# EAGLE board TeslaBMS (EAGLE 7.4.0)
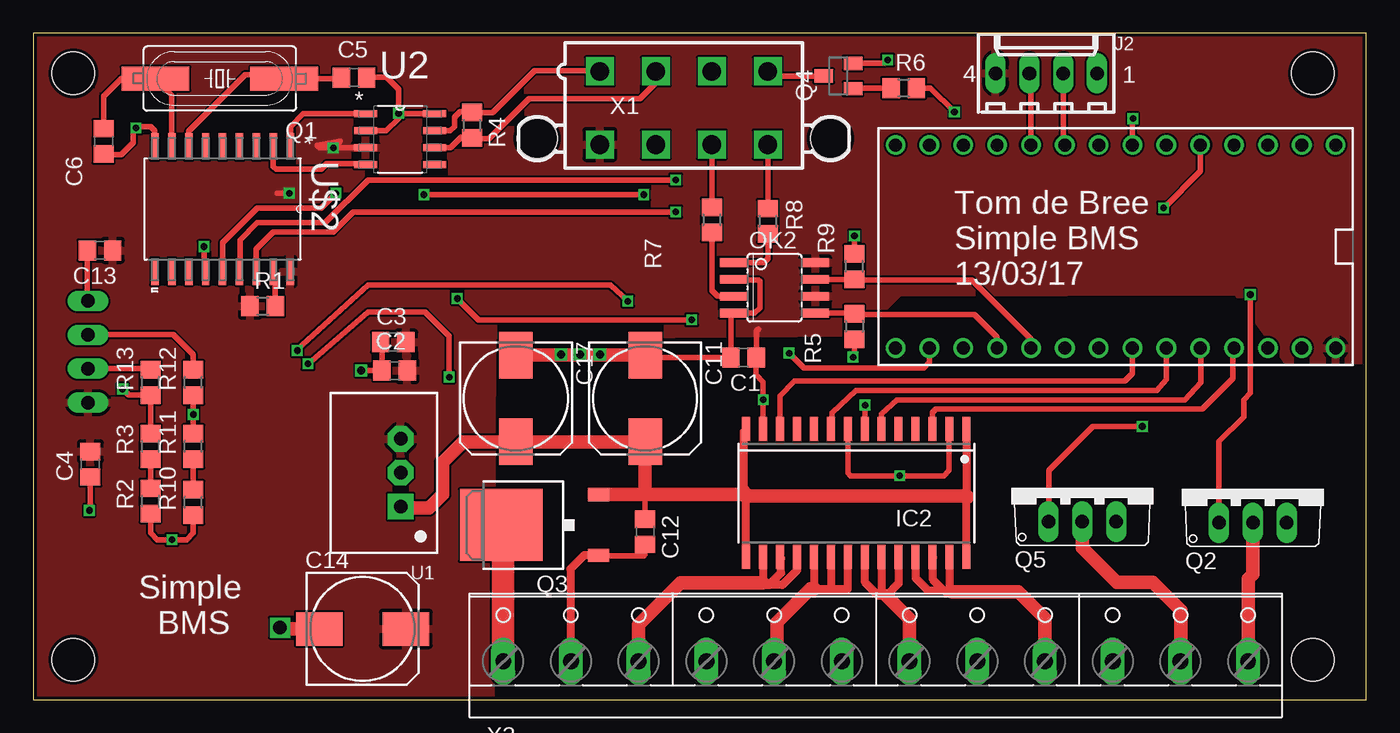
[diagram p0: board, top side]
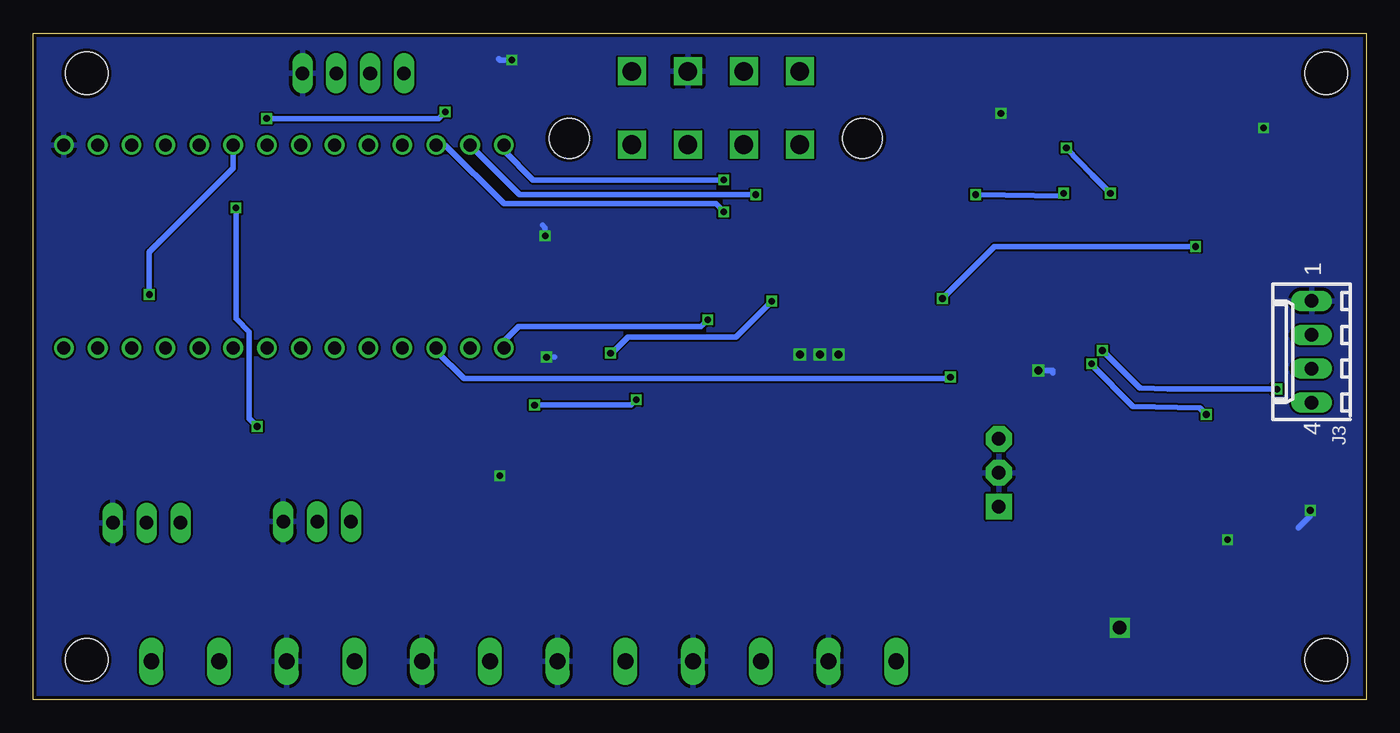
[diagram p1: board, bottom side, seen from below]

Size 100 x 50 mm. Coordinates in mm from the lower left corner, seen from the top.
Outline: 0,0 100,0 100,50 0,50 0,0
Copper layers (1*16): Top 0.035mm / dielectric 1.5mm / Bottom 0.035mm
Design rules "SeeedStudio_2layer_DRU_no_angle_20140221": minimum track width 6mil, minimum drill 12mil, track to track 6mil, track to pad 6mil, pad to pad 6mil, via to via 6mil, smd to smd 0mil, copper to edge 10mil, drill to drill 10mil, minimum pad ring 10mil, minimum via ring 6mil, stop-mask expansion 2mil, vias tented up to drill 100mil, thermal gap 10mil
Holes 3.2 mm at 96,3 96,47 3,47 3,3

## Footprints (pad centres in the part's own frame; a part is rotated, then mirrored left to right if it is on the bottom)
C0805 = smd 1.3 x 1.5: 1 -0.95,0; 2 0.95,0
153CLV-0810 = smd 3.5 x 2.5: + 3.25,0; - -3.25,0
PG-DSO-28 = smd 0.6 x 1.8: 1 -8.255,-4.8; 2 -6.985,-4.8; 3 -5.715,-4.8; 4 -4.445,-4.8; 5 -3.175,-4.8; 6 -1.905,-4.8; 7 -0.635,-4.8; 8 0.635,-4.8; 9 1.905,-4.8; 10 3.175,-4.8; 11 4.445,-4.8; 12 5.715,-4.8; 13 6.985,-4.8; 14 8.255,-4.8; 15 8.255,4.8; 16 6.985,4.8; 17 5.715,4.8; 18 4.445,4.8; 19 3.175,4.8; 20 1.905,4.8; 21 0.635,4.8; 22 -0.635,4.8; 23 -1.905,4.8; 24 -3.175,4.8; 25 -4.445,4.8; 26 -5.715,4.8; 27 -6.985,4.8; 28 -8.255,4.8
6410-04 = drill 1.016 long: 1 3.81,0; 2 1.27,0; 3 -1.27,0; 4 -3.81,0
SOIC08 = smd 0.66 x 2.032: 1 -1.905,-3.073; 2 -0.635,-3.073; 3 0.635,-3.073; 4 1.905,-3.073; 5 1.905,3.073; 6 0.635,3.073; 7 -0.635,3.073; 8 -1.905,3.073
SM49 = smd 5.08 x 1.778: 1 -4.826,0; 2 4.826,0
TO220V = drill 1.016 long: 1 -2.54,-2.54; 2 0,-2.54; 3 2.54,-2.54
TO252 = smd 1 x 1.6: 1 -2.28,-4.8; 2 2.28,-4.8 | smd 5.4 x 6.2: 3 0,2.5
SOT23 = smd 1 x 1.4: 1 -0.95,-1.1; 2 0.95,-1.1; 3 0,1.1
R0805 = smd 1.3 x 1.5: 1 -0.95,0; 2 0.95,0
R-78XX = drill 1.016 pad 1.93 square: 1 -2.54,0 | drill 1.016 pad 1.93 octagon: 2 0,0; 3 2.54,0
SOIC127P600X175-8N = smd 1.702 x 0.533: 1 -2.591,1.905; 2 -2.591,0.635; 3 -2.591,-0.635; 4 -2.591,-1.905; 5 2.591,-1.905; 6 2.591,-0.635; 7 2.591,0.635; 8 2.591,1.905
SOIC127P1034X264-18N = smd 1.981 x 0.559: 1 -4.699,5.08; 2 -4.699,3.81; 3 -4.699,2.54; 4 -4.699,1.27; 5 -4.699,0; 6 -4.699,-1.27; 7 -4.699,-2.54; 8 -4.699,-3.81; 9 -4.699,-5.08; 10 4.699,-5.08; 11 4.699,-3.81; 12 4.699,-2.54; 13 4.699,-1.27; 14 4.699,0; 15 4.699,1.27; 16 4.699,2.54; 17 4.699,3.81; 18 4.699,5.08
TEENSY3-DIL = drill 0.965: 0 -7.62,13.97; 1 -7.62,11.43; 2 -7.62,8.89; 3 -7.62,6.35; 3.3V 7.62,11.43; 4 -7.62,3.81; 5 -7.62,1.27; 6 -7.62,-1.27; 7 -7.62,-3.81; 8 -7.62,-6.35; 9 -7.62,-8.89; 10 -7.62,-11.43; 11 -7.62,-13.97; 12 -7.62,-16.51; 13 7.62,-16.51; 14/A0 7.62,-13.97; 15/A1 7.62,-11.43; 16/A2 7.62,-8.89; 17/A3 7.62,-6.35; 18/A4 7.62,-3.81; 19/A5 7.62,-1.27; 20/A6 7.62,1.27; 21/A7 7.62,3.81; 22/A8 7.62,6.35; 23/A9 7.62,8.89; AGND 7.62,13.97; GND -7.62,16.51; VIN 7.62,16.51
5566-8 = drill 1.4 square: 1 6.3,-2.75; 2 2.1,-2.75; 3 -2.1,-2.75; 4 -6.3,-2.75; 5 6.3,2.75; 6 2.1,2.75; 7 -2.1,2.75; 8 -6.3,2.75 | hole 3: 11,2.29; -11,2.29
W237-12P = drill 1.194 long: 1 -27.94,-0.635; 2 -22.86,-0.635; 3 -17.78,-0.635; 4 -12.7,-0.635; 5 -7.62,-0.635; 6 -2.54,-0.635; 7 2.54,-0.635; 8 7.62,-0.635; 9 12.7,-0.635; 10 17.78,-0.635; 11 22.86,-0.635; 12 27.94,-0.635

## Placement (x,y rotation side)
C1  100nf  [C0805]  53.29,25.67 180 top
C2  100nf  [C0805]  27.11,24.68 180 top
C3  100nF  [C0805]  27.01,26.83 0 top
C4  100nF  [C0805]  4.27,17.66 90 top
C5  15pF  [C0805]  24.06,46.68 180 top
C6  15pF  [C0805]  5.28,41.89 90 top
C11  100uf  [153CLV-0810]  45.9,22.6 270 top
C12  100nf  [C0805]  45.9,12.6 270 top
C13  100nf  [C0805]  5,33.7 180 top
C14  100uf  [153CLV-0810]  24.7,5.3 0 top
C17  100uf  [153CLV-0810]  36.2,22.6 270 top
IC2  BTS5440G  [PG-DSO-28]  61.74,15.5 180 top
J2  22-27-2041-04  [6410-04]  76,47 0 top
J3  22-27-2041-04  [6410-04]  4.1,26.1 90 bottom
OK2  ACPL-227  [SOIC08]  55.6,30.9 270 top
Q1  16Mhz  [SM49]  13.99,46.6 180 top
Q2  [TO220V]  91.5,15.8 0 top
Q3  FDD4141TO252  [TO252]  37.6,13.1 90 top
Q4  [SOT23]  60.4,46.8 90 top
Q5  [TO220V]  78.7,15.9 0 top
R1  10K  [R0805]  17.21,29.52 0 top
R2  10K  [R0805]  8.8,14.9 90 top
R3  10K  [R0805]  8.8,19 90 top
R4  120  [R0805]  32.9,43.1 270 top
R5  10K  [R0805]  61.6,28 270 top
R6  1K  [R0805]  65.3,45.9 0 top
R7  4.7K  [R0805]  50.9,36 270 top
R8  4.7K  [R0805]  55.1,35.9 270 top
R9  10K  [R0805]  61.6,32.5 90 top
R10  10K  [R0805]  12,14.8 90 top
R11  10K  [R0805]  12,19 90 top
R12  10K  [R0805]  12,23.8 90 top
R13  10K  [R0805]  8.8,23.8 90 top
U1  R-78XX  [R-78XX]  27.56,17.02 90 top
U2  PCA82C250T/N4,112  [SOIC127P600X175-8N]  27.52,42.05 0 top
U$2  MCP2510-I/SO  [SOIC127P1034X264-18N]  14.2,36.81 270 top
U$4  TEENSY_3.1_DIL  [TEENSY3-DIL]  81.2,34 270 top
X1  5566-8  [5566-8]  48.8,44.4 180 top
X3  [W237-12P]  63.2,3.5 0 top

## Library data of the parts
C1-C6 C11-C14 C17 R1-R13 = resistor
IC2 = Custom-TDB; OC_FARNELL: unknown; OC_NEWARK: unknown
J2 J3 X1 = con-molex; OC_FARNELL: unknown; OC_NEWARK: unknown
OK2 = optocoupler; MF: VISHAY/TELEFUNKEN; MPN: ILD205T; OC_FARNELL: 1469512; OC_NEWARK: 20H8678
Q1 = crystal; OC_FARNELL: unknown; OC_NEWARK: unknown
Q2 Q5 = adafruit
Q3 = transistor-fet
Q4 = semicon-smd-ipc
U1 = dc-dc-converter
U2 = NXP_By_element14_Batch_1; MPN: PCA82C250T/N4,112; OC_FARNELL: 1085275; OC_NEWARK: 99R2922; PACKAGE: SOIC-8; SUPPLIER: NXP Semiconductor
U$2 = Microchip_By_element14_Batch_1; MPN: MCP2510-I/SO; OC_FARNELL: 9758542; OC_NEWARK: 61K2944; PACKAGE: SOIC-18; SUPPLIER: Microchip
U$4 = Teensy_3_and_LC_Series_Boards_v1.1
X3 = con-wago-508; OC_FARNELL: unknown; OC_NEWARK: unknown

## Nets
+12V: Q3.3 X3.1
AGND: U$4.AGND
CANH1: R4.1 U2.7 X1.1
CANH2: J3.3 R13.2
CANL1: R4.2 U2.6 X1.2
CANL2: J3.2 R12.2
CUR1: R3.2 R13.1 U$4.14/A0
CUR2: R11.2 R12.1 U$4.15/A1
FUELGAUGE: R6.2 U$4.5
FUELOUT: Q4.3 X1.4
GND: C1.2 C2.2 C3.1 C4.1 C5.1 C6.1 C11.- C12.2 C13.2 C14.- C17.- IC2.2 IC2.8 J2.1 J3.1 OK2.2 OK2.4 Q2.3 Q3.1 Q4.2 Q5.3 R2.1 R5.2 R9.2 R10.1 U1.2 U2.2 U2.8 U$2.9 U$4.GND X1.3 X3.2 X3.4 X3.6 X3.8 X3.10
I1: OK2.5 R5.1 U$4.16/A2
I2: OK2.7 R9.1 U$4.17/A3
INPUT1: R7.1 X1.7
INPUT2: R8.1 X1.8
MISO: U$2.15 U$4.12
MOSI: U$2.14 U$4.11
N$1: U2.4 U$2.2
N$2: U2.1 U$2.1
N$3: R1.2 U$2.17
N$4: R2.2 R3.1
N$5: R10.2 R11.1
N$8: C6.2 Q1.2 U$2.8
N$14: Q4.1 R6.1
N$16: OK2.3 R7.2
N$17: OK2.1 R8.2
N$18: IC2.22 IC2.23 IC2.24 X3.7
N$19: IC2.19 IC2.20 IC2.21 X3.5
N$20: IC2.16 IC2.17 IC2.18 X3.3
N$26: IC2.25 IC2.26 IC2.27 X3.9
OSCCAN1: C5.2 Q1.1 U$2.7
OUT1: IC2.3 U$4.23/A9
OUT2: IC2.6 U$4.22/A8
OUT3: IC2.9 U$4.21/A7
OUT4: IC2.12 U$4.20/A6
OUT5: Q5.1 U$4.3
OUT5L: Q5.2 X3.11
OUT6: Q2.1 U$4.4
OUT6L: Q2.2 X3.12
RXBMS: J2.2 U$4.7
SCK: U$2.13 U$4.13
SSCAN1: U$2.16 U$4.10
SSCAN2: U$4.9
TXBMS: J2.3 U$4.8
V+: C11.+ C12.1 C17.+ IC2.1 IC2.14 IC2.15 IC2.28 Q3.2 U1.1
VCC: C1.1 C2.1 C3.2 C4.2 C13.1 C14.+ IC2.7 IC2.13 J2.4 J3.4 OK2.6 OK2.8 R1.1 U1.3 U2.3 U$2.18 U$4.VIN X1.5
VREF: U$4.3.3V

## Tracks (layer width: path | path; a pad name or v marks a point on that pad's centre or on a via)
+12V
  Top 1.676: X3.1 35.26,12.94 Q3.3
CANH1
  Top 0.406: U2.7 31.29,42.69 31.6,43 31.6,43.7 32,44.1 32.85,44.1 R4.1 34.45,44.05 37.6,47.2 42.45,47.2 X1.1
CANH2
  Top 0.406: J3.3 8.72,24.83 R13.2
CANL1
  Top 0.406: X1.2 46.7,46.3 45.5,45.1 37.2,45.1 34.2,42.1 33.5,42.1 | 33.5,42.1 32.95,42.1 R4.2 | U2.6 31.32,41.41 32.1,42.2 33.4,42.2 33.5,42.1
CANL2
  Top 0.406: R12.2 12,25.9 10.5,27.4 4.13,27.4 J3.2
CUR1  (via drill 0.5)
  Top 0.406: R3.2 R13.1 7.15,22.85 v6.7,23.3 | v19.8,26.2 19.75,26.25 25.1,31.1 43.3,31.1 v44.6,29.9 | U$4.14/A0 67.23,25.33 66.8,24.9 57.8,24.9 v56.7,26
  Bottom 0.406: v6.7,23.3 14.9,23.3 16.9,23.4 17,23.4 v19.8,26.2 | v56.7,26 56.6,26 55.4,27.2 47.3,27.2 v44.6,29.9
CUR2  (via drill 0.5)
  Top 0.406: R11.2 v12,21.4 R12.1 | v31.2,24.2 31.2,27.3 29.4,29.1 25.1,29.1 v20.6,25.2
  Bottom 0.406: U$4.15/A1 69.77,26.17 67.7,24.1 31.3,24.1 v31.2,24.2 | v20.6,25.2 20.6,25.1 17.5,22 12.5,21.9 v12,21.4
FUELGAUGE  (via drill 0.5)
  Top 0.406: U$4.5 82.47,43.57 v82.5,43.6 | v69.1,44.1 67.3,45.9 R6.2
  Bottom 0.406: v82.5,43.6 69.6,43.6 v69.1,44.1
FUELOUT
  Top 0.406: Q4.3 55.45,46.8 X1.4
GND  (via drill 0.5, 0.6, 1)
  Top 0.406: 40.3,2.9 X3.2 | U$2.9 9.12,42.68 8.8,43 7.8,43 v7.7,42.9 7.5,42.7 7.5,41.8 6.6,40.9 5.32,40.9 C6.1 | U2.2 26.48,42.69 27.4,43.6 27.4,43.8 | 27.4,43.8 v27.4,44 27.4,45.8 26.5,46.7 25.03,46.7 C5.1 | U2.8 27.55,43.95 27.4,43.8 | C12.2 45.9,10.9 45.8,10.8 42.42,10.8 Q3.1 | C13.2 4.05,29.96 J3.1 | OK2.2 52.56,31.5 54.4,31.5 54.5,31.4 54.5,29.4 54.09,29 OK2.4 52.34,28.81 C1.2 45.48,25.67 45.3,25.85 42.5,25.85 v42.5,25.9 | R5.2 61.6,25.8 v61.5,25.7 | Q4.2 63.85,47.75 v64.1,48 | R9.2 v61.6,34.8 | IC2.8 61.1,17 61.3,16.8 v65,16.8 68.3,16.8 68.7,17.2 68.7,20.27 IC2.2 | R2.1 8.8,12.5 9.3,12 v10.4,12 11.5,12 12,12.5 R10.1 | C4.1 4.27,14.27 v4.2,14.2 | C3.1 26.16,26.83 C2.2 24.6,24.68 v24.6,24.7
  Top 0.61: Q3.1 41.32,10.82 40.3,9.8 40.3,2.9
  Top 1.016: C17.- 45.3,25.85 C11.- | C14.- 18.6,5.3 v18.5,5.4
  Bottom 0.406: v61.5,25.7 60.9,25.7 | v64.1,48 65,48 65.1,48.1 | v61.6,34.8 61.6,35.4 61.8,35.6 | v4.2,14.2 4.2,13.8 5.1,12.9 | v24.6,24.7 23.5,24.7 23.5,24.5
  other vias: 39.6,25.9 41,25.9
  pour Bottom: 0,0 0,32 0.1,49.9 14.2,50 24.6,50.2 100.33,50 100.33,0
I1
  Top 0.406: U$4.16/A2 72.31,27.19 70.6,28.9 61.65,28.9 R5.1 61.55,29 OK2.5
I2
  Top 0.406: OK2.7 61.59,31.54 R9.1 61.65,31.5 70.4,31.5 74.85,27.05 U$4.17/A3
INPUT1
  Top 0.406: R7.1 X1.7
INPUT2
  Top 0.406: R8.1 X1.8
MISO  (via drill 0.5)
  Top 0.406: v48.2,39 25.1,39 21.9,35.8 16.8,35.8 15.5,34.5 15.5,32.14 U$2.15
  Bottom 0.406: U$4.12 64.69,41.19 62.5,39 v48.2,39
MOSI  (via drill 0.5)
  Top 0.406: U$2.14 14.2,34.3 16.8,36.9 21.6,36.9 v22.7,38 | v45.8,37.9 v29.3,37.9
  Bottom 0.406: U$4.11 63.51,37.9 v45.8,37.9 | v29.3,37.9 22.7,37.8 v22.7,38
N$1
  Top 0.406: U$2.2 18.01,39.99 18.2,39.8 21.6,39.8 22,40.2 24.87,40.2 U2.4
N$2
  Top 0.406: U2.1 20.25,43.95 19.3,43 19.3,41.53 U$2.1
N$3
  Top 0.406: R1.2 18.16,31.96 U$2.17
N$4
  Top 0.406: R3.1 R2.2
N$5
  Top 0.406: R10.2 R11.1
N$8
  Top 0.406: U$2.8 10.39,45.37 Q1.2 6.6,46.6 5.28,45.28 C6.2
N$14
  Top 0.406: R6.1 61.55,45.9 Q4.1
N$16
  Top 0.406: OK2.3 51.34,30.27 50.9,30.7 R7.2
N$17
  Top 0.406: OK2.1 54.8,32.8 55.1,33.1 R8.2
N$18
  Top 0.61: 63.6,7.8 64,7.8 64.92,8.71 IC2.24 | 63.6,7.8 63.4,7.8 62.4,8.8 62.4,10.68 IC2.22 | IC2.23 63.65,7.84 63.6,7.8
  Top 1.016: X3.7 65.74,6.06 64,7.8
N$19
  Top 0.61: IC2.19 58.56,8.34 58.6,8.3 59.9,8.3 | 59.9,8.3 61.1,8.3 IC2.21 | IC2.20 59.84,8.37 59.9,8.3
  Top 1.016: 58.6,8.3 58.3,8.3 55.8,5.8 55.8,3.08 X3.5
N$20
  Top 0.61: IC2.18 57.3,9.7 56.2,8.6 55.2,8.6 | 55.2,8.6 54.9,8.6 54.76,8.74 IC2.16 | 55.2,8.6 56.1,9.5 56.1,10.62 IC2.17
  Top 1.016: 54.76,8.74 48.55,8.74 45.4,5.6 45.4,2.88 X3.3
N$26
  Top 0.61: IC2.25 66.19,9.12 67.1,8.2 68.8,8.2 | 68.8,8.2 68.9,8.1 68.4,8.1 67.5,9 67.5,10.65 IC2.26 | IC2.27 68.72,8.28 68.8,8.2
  Top 1.016: 68.9,8.1 73.9,8.1 75.9,6.1 X3.9
OSCCAN1
  Top 0.406: C5.2 23.03,46.6 Q1.1 18.52,46.9 15.9,46.9 11.66,42.66 U$2.7
OUT1
  Top 0.406: IC2.3 67.45,21.55 67.7,21.8 87.7,21.8 90,24.1 90,26.29 U$4.23/A9
OUT2
  Top 0.406: IC2.6 63.65,21.45 64.8,22.5 86.4,22.5 87.6,23.8 87.6,26.33 U$4.22/A8
OUT3
  Top 0.406: U$4.21/A7 85.01,24.01 84.3,23.2 61.7,23.2 59.9,21.5 59.9,20.36 IC2.9
OUT4
  Top 0.406: U$4.20/A6 82.47,24.47 81.9,23.9 57.1,23.9 56,22.8 56,20.32 IC2.12
OUT5  (via drill 0.5)
  Top 0.406: U$4.3 87.55,39.65 v84.8,36.9 | v83.2,20.5 79.5,20.5 76.2,17.2 76.2,13.4 Q5.1
  Bottom 0.406: v84.8,36.9 84.8,28.6 83.8,27.6 83.8,21.1 v83.2,20.5
OUT5L
  Top 1.016: Q5.2 78.7,11.4 81.3,8.8 84,8.8 86.1,6.7 86.1,2.9 X3.11
OUT6  (via drill 0.5)
  Top 0.406: Q2.1 88.96,19.36 90.8,21.2 90.8,22.5 91.3,23 v91.3,30.4
  Bottom 0.406: v91.3,30.4 91.3,33.6 85,39.9 U$4.4
OUT6L
  Top 1.016: X3.12 91.14,9.04 91.5,9.4 Q2.2
RXBMS
  Top 0.406: J2.2 77.27,41.74 U$4.7
SCK  (via drill 0.5)
  Top 0.406: v49.4,28.5 33.4,28.5 v31.8,30.1 | v12.8,34 12.8,32.24 U$2.13
  Bottom 0.406: U$4.13 64.69,26.91 63.6,28 49.9,28 v49.4,28.5 | v31.8,30.1 27.9,34 v12.8,34
SSCAN1  (via drill 0.5)
  Top 0.406: v48.2,36.6 24,36.6 22.5,35.1 18,35.1 16.7,33.8 16.7,32.15 U$2.16
  Bottom 0.406: U$4.10 69.12,41.62 64.7,37.2 48.8,37.2 v48.2,36.6
TXBMS
  Top 0.406: U$4.8 74.85,46.88 J2.3
V+
  Top 0.406: C12.1 45.9,15.38
  Top 0.61: IC2.1 70,15.3 70.1,15.2 70,15.1 IC2.28 | IC2.15 53.48,15.52 | IC2.14 53.3,20.11 53.3,15.9 53.48,15.71 53.48,15.52 | 53.48,15.52 53.7,15.3
  Top 1.016: Q3.2 45.9,15.38 | 45.9,15.38 53.32,15.38 53.4,15.3 53.7,15.3 70,15.3 70.1,15.2 | 45.9,15.38 C11.+ C17.+ 32.25,19.35 30.7,17.8 30.7,15.4 29.7,14.4 27.64,14.4 U1.1
VCC  (via drill 0.5)
  Top 0.406: 54.4,27.8 54.24,27.64 C1.1 54.2,25.63 54.2,24.4 54.76,23.84 54.76,22.8 v54.76,22.5 IC2.13 | U2.3 21.48,41.41 21.3,41.6 23,41.9 v22.5,41.4 | v19.2,38 18.3,38 | IC2.7 62.38,22.07 v62.4,22.1
  Bottom 0.406: v22.5,41.4 20.6,39.4 v19.2,38 | v62.4,22.1 55.16,22.1 v54.76,22.5
  pour Top: 0.4,0 0.2,32 0.1,50 100,50 100,25.4 94,25.5 90.3,30.6 64.9,30.5 61.9,27.5 34.4,27.3 34.3,0.16

## Text on the board
tNames: Tom de Bree / Simple BMS / 13/03/17 | Simple / BMS